# Altium PCB DVT-Volga.PcbDoc
Units mm, origin at the board's own origin, x right, y up, seen from the top; angles counter-clockwise.
Board outline 65 x 45 mm, 2 copper layers (Top Layer, Bottom Layer); 14 components, 12 nets, 61 pads, 1 vias.
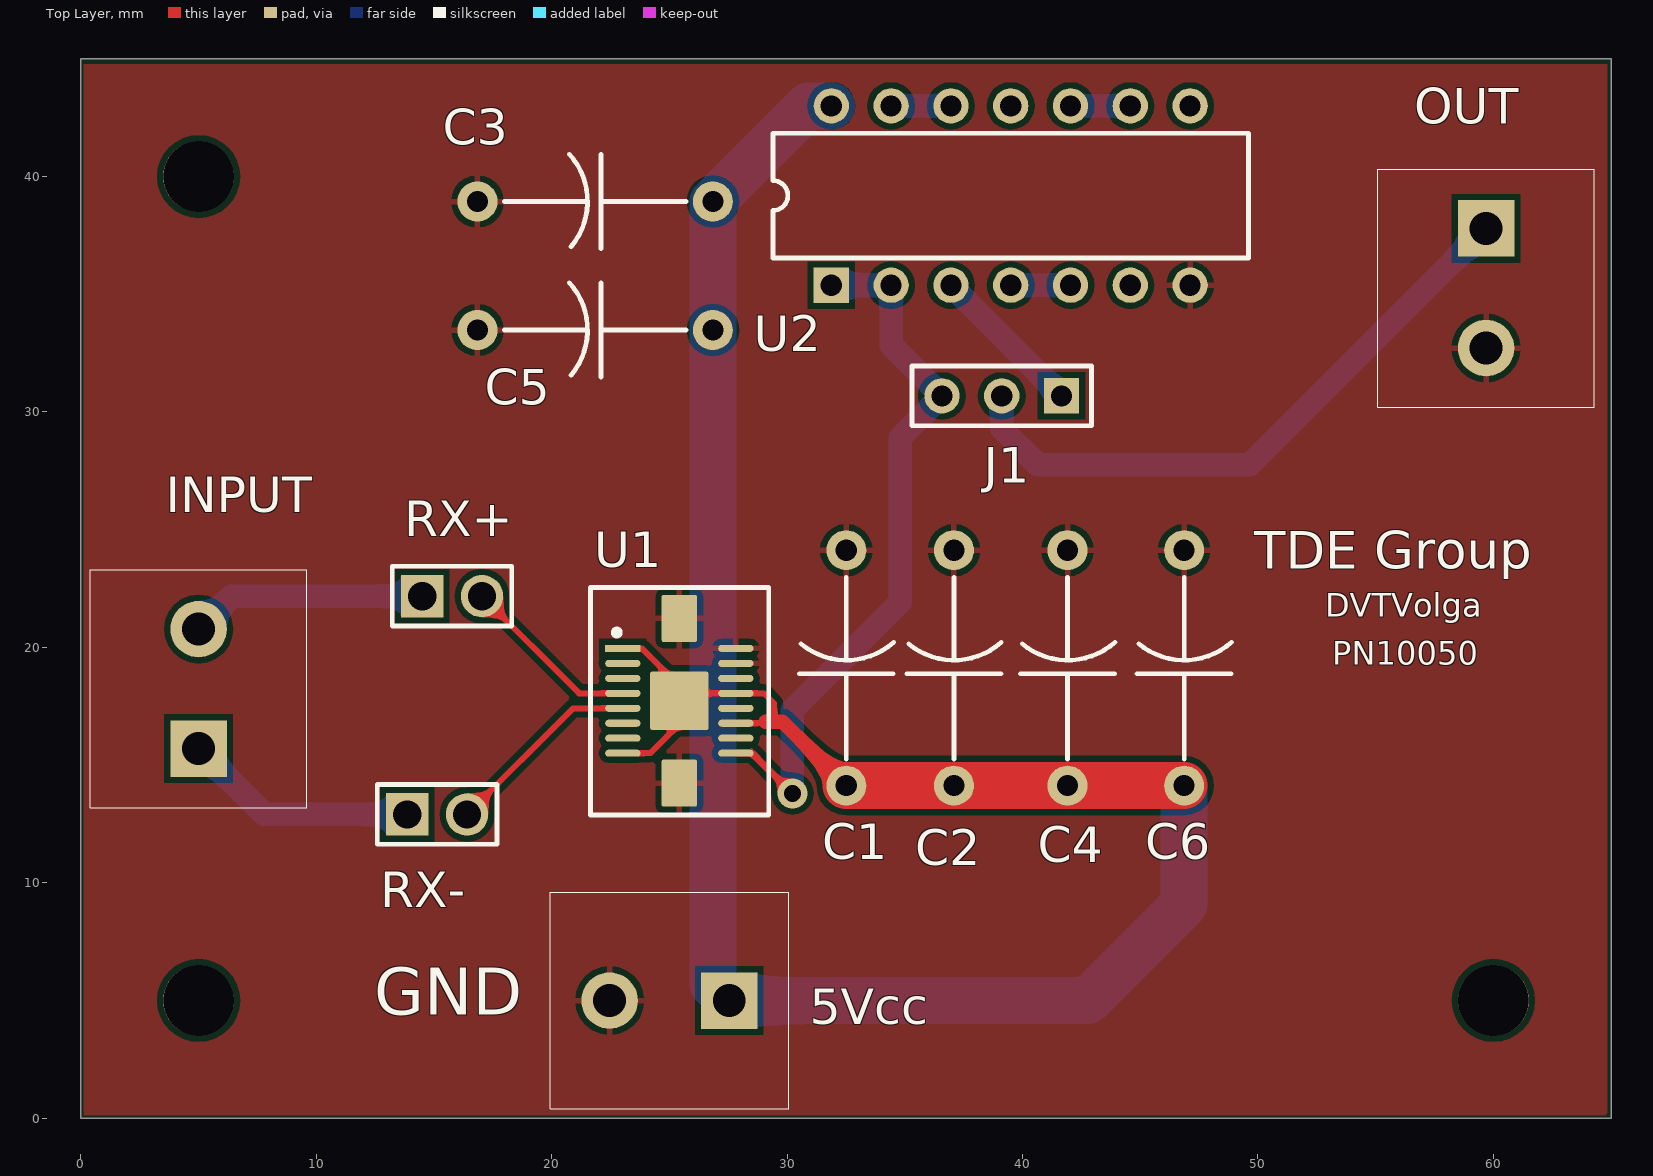
[diagram p0: Top Layer view]
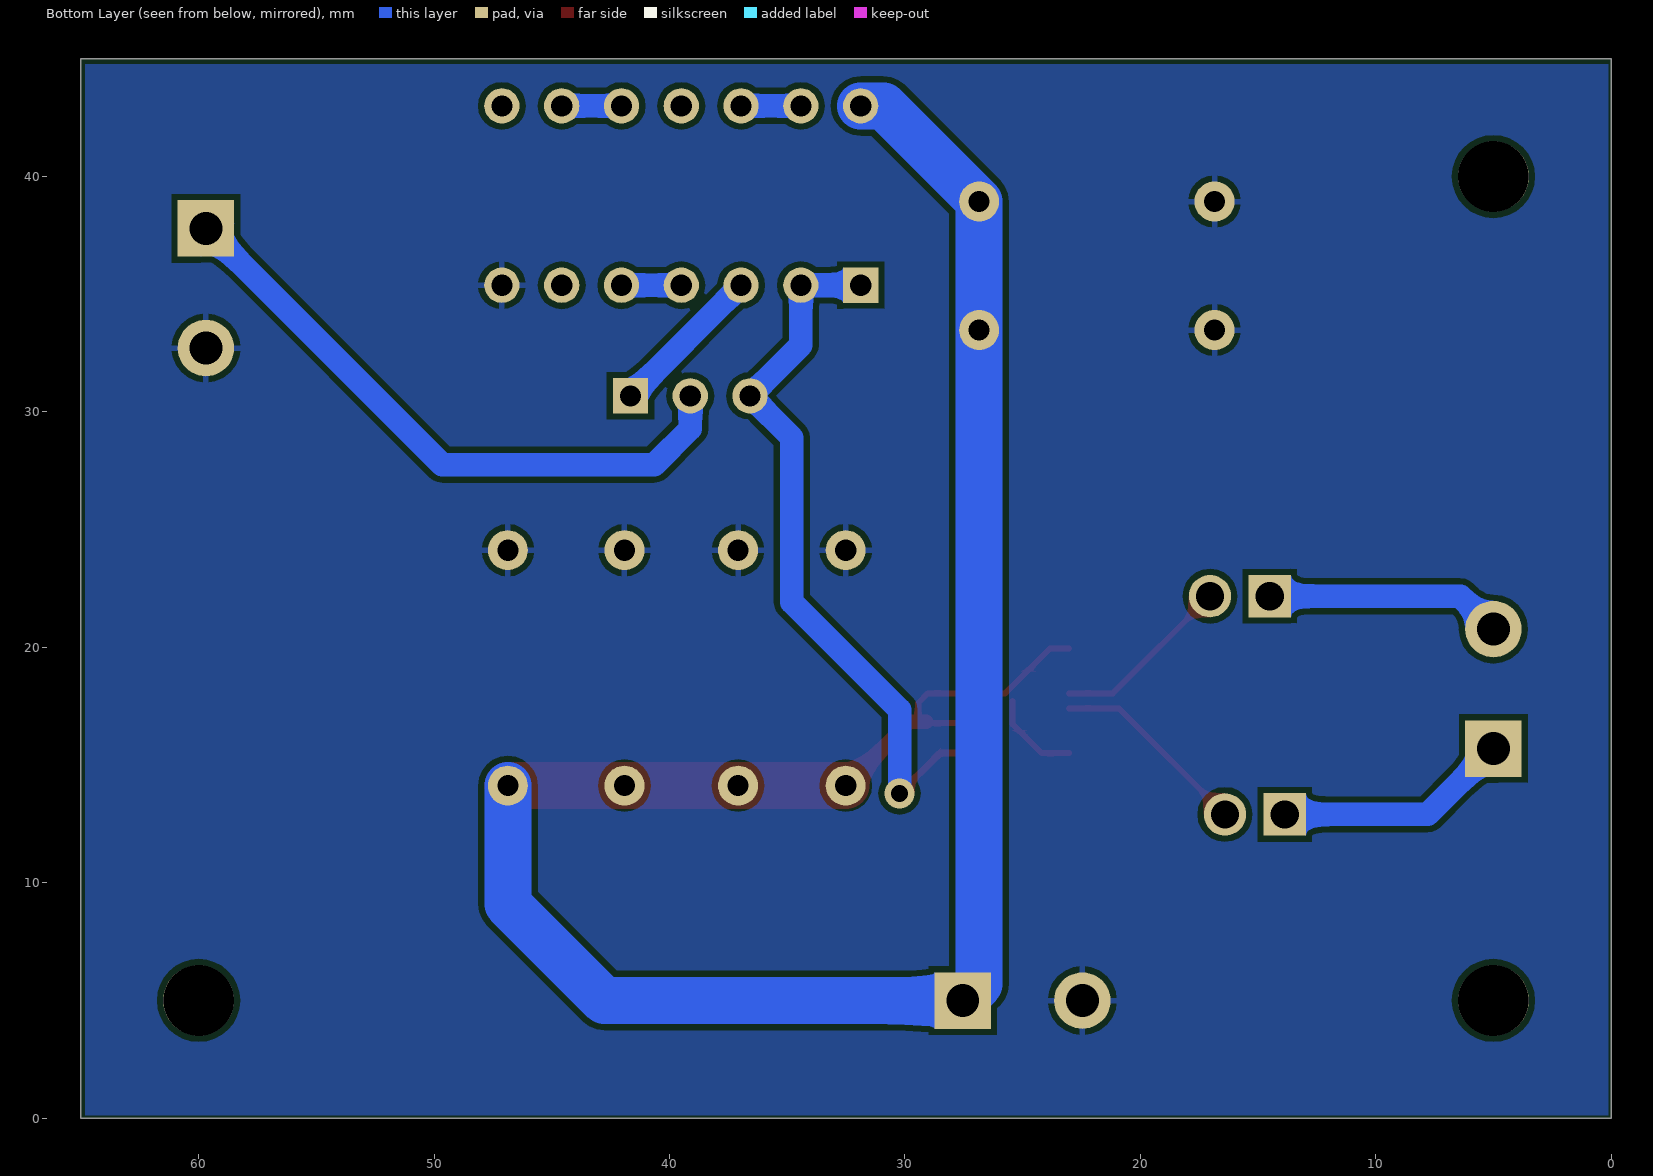
[diagram p1: Bottom Layer view, seen from below]

## Layer stack, top to bottom
Top Solder: solder mask 0.0102, Solder Resist, Dk 3.5
Top Layer: signal copper 0.0356
Dielectric 1: dielectric 0.32, FR-4, Dk 4.8
Bottom Layer: signal copper 0.0356
Bottom Solder: solder mask 0.0102, Solder Resist, Dk 3.5

## Board outline
0,-0.004 65,-0.004 65,44.996 0,44.996

## Design rules (kind name [scope] priority, off if disabled: settings)
Clearance Polygons [InPolygon] p1: gap=0.254
Clearance [All] p2: gap=0.15
HoleSize [All] p1: absolutevalues=TRUE maxlimit=5 minlimit=0.025 maxpercent=80.000 minpercent=20.000
MinimumSolderMaskSliver [All] p1: minsoldermaskwidth=0.1
PolygonConnect [All] p1: connectstyle=Relief reliefconductorwidth=0.254 reliefentries=4 polygonreliefangle="90 Angle" airgapwidth=0.254
RoomDefinition DVT-Volga [InComponentClass('DVT-Volga')] p1: confinementstyle=ConfineIn formatcopy=TRUE lockcomponents=FALSE outline -2.775,-1.956 68.091,-1.956 68.091,46.812 -2.775,46.812
RoutingVias [All] p1: holewidth=0.711 width=1.27 viastyle="Through Hole" minholewidth=0 minwidth=0 maxholewidth=0.711 maxwidth=1.27
SilkToSilkClearance [All] p1: silktosilkclearance=0
SilkToSolderMaskClearance [IsPad] p1: minsilkscreentomaskgap=0.1 clearancetoexposedcopper=TRUE
SolderMaskExpansion [All] p1: expansion=0.102
Width [All] p1: maxlimit=4 minlimit=0.254 preferedwidth=0.5
26 further rules are at their usual default settings.

## Components (designator, comment, footprint, x,y, rotation, side; value= is the part's Value field where it differs from the comment)
5Vcc "PHOENIX_1715721" Phoenix-2-5_08 25,4.996 r180 top
C1 "Capacitor-Dummy-THT" Dummy-10mm 32.512,19.126 r90 top
C2 "Capacitor-Dummy-THT" Dummy-10mm 37.084,19.126 r90 top
C3 "Capacitor-Dummy-THT" Dummy-10mm 21.844,38.938 r180 top
C4 "Capacitor-Dummy-THT" Dummy-10mm 41.91,19.126 r90 top
C5 "Capacitor-Dummy-THT" Dummy-10mm 21.844,33.477 r180 top
C6 "Capacitor-Dummy-THT" Dummy-10mm 46.863,19.126 r90 top
INPUT "PHOENIX_1715721" Phoenix-2-5_08 5,18.237 r90 top
J1 "Header-3" HDR1X3 39.116,30.683 r180 top
OUT "PHOENIX_1715721" Phoenix-2-5_08 59.69,35.255 r270 top
RX+ "PHOENIX_1715721" HDR1X2 15.767,22.174 r0 top
RX- "PHOENIX_1715721" HDR1X2 15.132,12.903 r0 top
U1 "CHT-VOLGA" TDFP16 25.419,17.729 r0 top
U2 "SN7400N" DIP-14 39.497,39.192 r0 top

## Footprints (in the part's own frame and the unit in brackets; to place one, negate y for a bottom-side part, rotate by r counter-clockwise, add the part's x,y. Pads: shape width x height; smd on the part's side, far side on the other; paste and mask are expansions set on the pad)
DIP-14 [mm] "DIP; 14 Leads; Row Spacing 7.62 mm; Pitch 2.54 mm"
  rect 1.5x1.5 hole 0.9: 1(-7.62,-3.81)
  round 1.5 hole 0.9: 2(-5.08,-3.81) 3(-2.54,-3.81) 4(0,-3.81) 5(2.54,-3.81) 6(5.08,-3.81) 7(7.62,-3.81) 8(7.62,3.81) 9(5.08,3.81) 10(2.54,3.81) 11(0,3.81) 12(-2.54,3.81) 13(-5.08,3.81) 14(-7.62,3.81)
  silkscreen extent -10.1,-2.65 10.1,2.65, body extent -10.02,-2.6 10.09,2.7, height 3
Dummy-10mm [mm] "Dummy-10mm"
  round 1.7 hole 0.9: 1(-5,0) 2(5,0)
  silkscreen extent -3.88,-2.01 3.85,2, body extent -2.39,-0.88 2.41,0.88, height 1.87
HDR1X2 [mm] "Connector; Header; 2 Position"
  rect 1.8x1.8 hole 1.2: 1(-1.27,0)
  round 1.8 hole 1.2: 2(1.27,0)
  silkscreen extent -2.54,-1.27 2.54,1.27, body extent -2.54,-1.27 2.54,1.27, height 8.62
HDR1X3 [mm] "Connector; Header; 3 Position"
  rect 1.5x1.5 hole 0.9: 1(-2.54,0)
  round 1.5 hole 0.9: 2(0,0) 3(2.54,0)
  silkscreen extent -3.81,-1.27 3.81,1.27, body extent -3.81,-1.27 3.81,1.27, height 8.62
Phoenix-2-5_08 [mm] "Phoenix, 1715721"
  rect 2.4x2.4 hole 1.4: 1(-2.54,0)
  round 2.4 hole 1.4: 2(2.54,0)
  silkscreen extent -5.06,-4.6 5.06,4.6, body extent -5.05,-5.19 5.85,4.61, height 14.2
TDFP16 [mm] "TDFP16"
  rect 1.5x0.3 smd: 1(-2.4,2.225)
  oval 1.5x0.3 smd: 2(-2.4,1.587) 3(-2.4,0.953) 4(-2.4,0.318) 5(-2.4,-0.318) 6(-2.4,-0.953) 7(-2.4,-1.587) 8(-2.4,-2.225) 9(2.4,-2.225) 10(2.4,-1.587) 11(2.4,-0.953) 12(2.4,-0.318) 13(2.4,0.318) 14(2.4,0.953) 15(2.4,1.587) 16(2.4,2.225)
  rrect10% 2.5x2.5 smd: 17(0,0)
  rrect10% 1.5x2 smd: 18(0,3.5) 19(0,-3.5)
  silkscreen extent -3.77,-4.85 3.8,4.81, body extent -2.53,-2.95 2.52,2.99, height 2

## Part data
5Vcc INPUT OUT: library part 2Pol_1715721, "Phoenix, 2 pol, 5.08mm, 22A, 715721"
J1: "Header-3-Pin"
RX+ RX-: library part Header-2, "Header, 2-Pin"
U1: "Comparator, Hi-Temp, 25MHz"
U2: "Quad NAND, TTL"

## Free pads (board coordinates)
  round 3 hole 3 unplated: 2(5,5) 3(60,5) 4(5,40)

## Via types
v1: diameter 1.27, hole 0.711, Top Layer to Bottom Layer, 1 vias

## Nets (pads, with @x,y where several pads share a name; then routed paths per layer and width w, separated by ;. In a path a pad name is that pad's centre, name@x,y a point inside that pad or via, vN(x,y) a via of type N, cw(c..) or ccw(c..) an arc to the next point about the centre after c; other vN are vias at no path point)
GND: 5Vcc.2 C1.2 C2.2 C3.2 C4.2 C5.2 C6.2 OUT.2 U1.15 U1.16 U1.18 U1.19 U2.7
NetINPUT_1: INPUT.1 RX-.1 | length 10
  Bottom Layer w1: INPUT.1 7.794,12.903 RX-.1
NetINPUT_2: INPUT.2 RX+.1 | length 10.1
  Bottom Layer w1: INPUT.2 6.397,22.174 RX+.1
NetJ1_1: J1.1 U2.3 | length 6.6
  Bottom Layer w1: U2.3 J1.1
NetJ1_2: J1.2 OUT.1 | length 26.8
  Bottom Layer w1: J1.2 39.116,29.286 40.64,27.762 49.657,27.762 OUT.1
NetJ1_3: J1.3 U1.9 U2.1 U2.2 | length 30.8
  Top Layer w0.3: U1.9 28.514,15.504 v1(30.226,13.792)
  Bottom Layer w1: v1(30.226,13.792) 30.226,17.348 34.798,21.92 34.798,28.905 J1.3 34.417,32.842 U2.2 U2.1
NetRX+_2: RX+.2 U1.4 | length 7.7
  Top Layer w0.254: RX+.2 21.164,18.047 U1.4
NetRX-_2: RX-.2 U1.5 | length 8.5
  Top Layer w0.254: RX-.2 20.91,17.412 U1.5
NetU2_4: U2.4 U2.5 | length 2.5
  Bottom Layer w1: U2.4 U2.5
NetU2_9: U2.9 U2.10 | length 2.5
  Bottom Layer w1: U2.10 U2.9
NetU2_12: U2.12 U2.13 | length 2.5
  Bottom Layer w1: U2.13 U2.12
VCC: 5Vcc.1 C1.1 C2.1 C3.1 C4.1 C5.1 C6.1 U1.1 U1.8 U1.11 U1.13 U1.17 U2.14 | length 99.3
  Top Layer w0.254: U1.8 24.191,15.504 25.419,16.732 U1.17 ; U1.1 23.829,19.954 25.736,18.047 U1.13 29.019,18.047 29.44,17.626 29.44,16.84 ; U1.11 29.019,16.777 29.083,16.84
  Top Layer w0.6: 29.083,16.84 29.44,16.84 29.798,16.84 C1.1
  Top Layer w2: C1.1 C2.1 C4.1 C6.1
  Bottom Layer w2: U2.14 30.908,43.002 C3.1 C5.1 26.844,5.692 5Vcc.1 42.766,4.996 46.863,9.093 C6.1
pads on no net: U1.2 U1.3 U1.6 U1.7 U1.10 U1.12 U1.14 U2.6 U2.8 U2.11

## Polygon pours and split planes (outlines as drawn)
GND on Top Layer "GND-1" (solid, pour order 0): 0.127,0.127 0.127,44.767 64.834,44.767 64.834,0.114 64.859,0.114
GND on Bottom Layer "GND-2" (solid, pour order 4): 0.114,0.127 0.114,44.767 64.821,44.767 64.821,0.127 0.114,0.127

## Silkscreen, mask and mechanical layers (free items; w line width, h text height)
Top Overlay:
  text "TDE Group" at 49.835,23.343 h1.6
  text "DVTVolga" at 52.857,21.298 h1
  text "PN10050" at 53.149,19.253 h1
  text "GND" at 12.465,4.394 h2
outline:
  the board outline again, w0.1

## Dimensions
0,-0.004 to 65,-0.004 on Mechanical 16
0,-0.004 to 0,44.996 on Mechanical 16